# Altium PCB PCB_Step.PcbDoc
Units mil, origin at the board's own origin, x right, y up, seen from the top; angles counter-clockwise.
Board outline 6000 x 4000 mil, 2 copper layers (Top Layer, Bottom Layer); 41 components, 47 nets, 176 pads, 0 vias.
Unrouted connection lines stored in the file: 118.
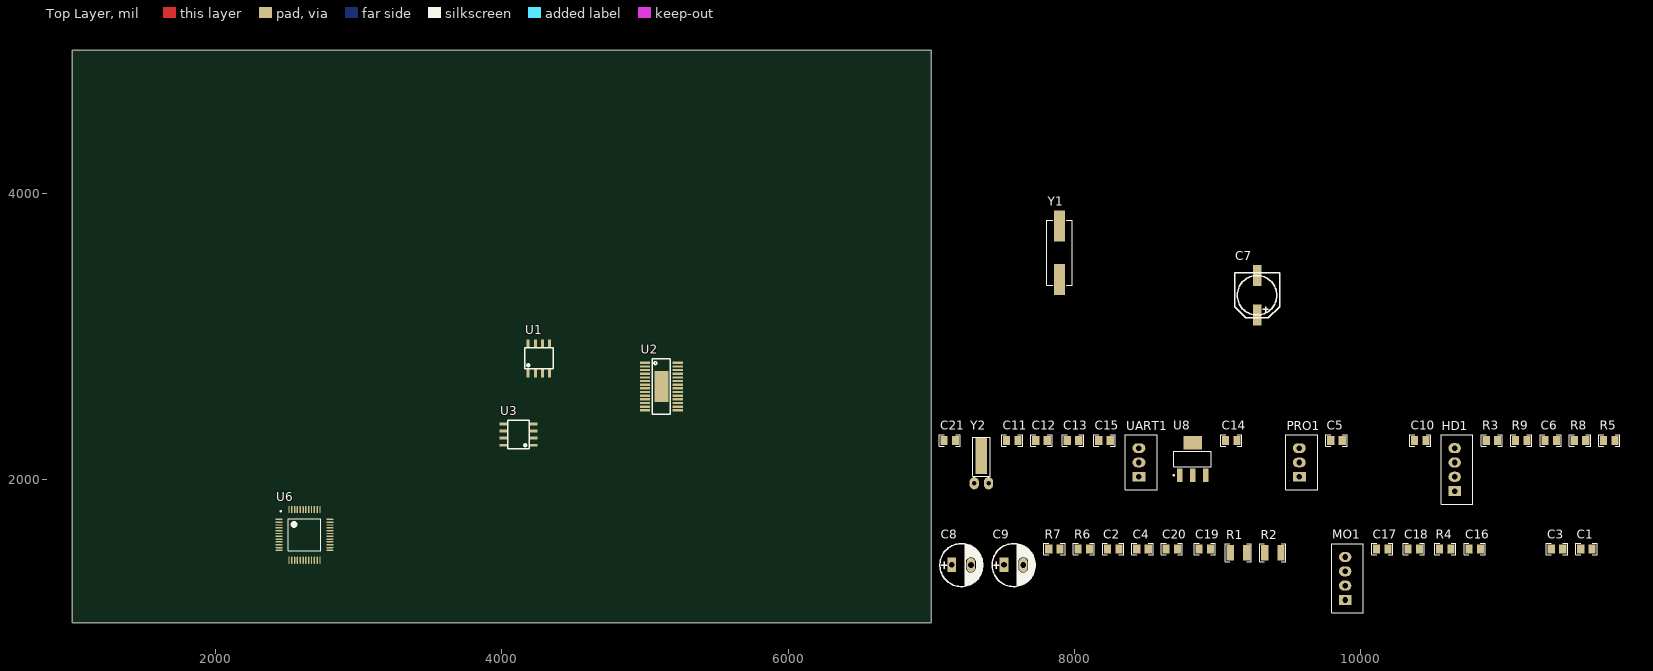
[diagram p0: Top Layer view]
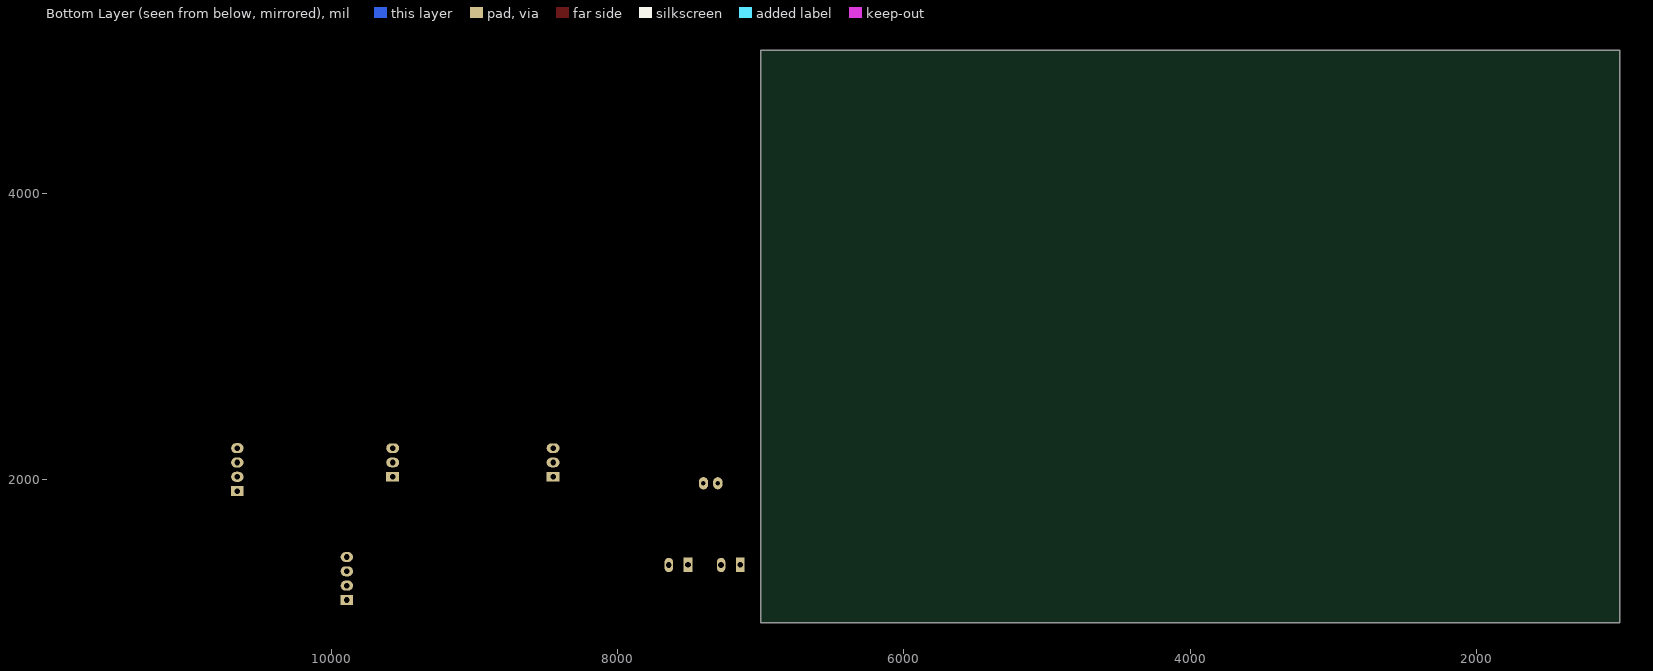
[diagram p1: Bottom Layer view, seen from below]

## Layer stack, top to bottom
Top Solder: solder mask 0.4, Solder Resist, Dk 3.5
Top Layer: signal copper 1.4
Dielectric 1: dielectric 12.6, FR-4, Dk 4.8
Bottom Layer: signal copper 1.4
Bottom Solder: solder mask 0.4, Solder Resist, Dk 3.5

## Board outline
1000,1000 7000,1000 7000,5000 1000,5000

## Design rules (kind name [scope] priority, off if disabled: settings)
Clearance [All] p1: gap=10 ignorepadtopadclearanceinfootprint=FALSE except(0: Arc-Hole Track-Hole SMDPad-Hole THPad-Hole Via-Hole Fill-Hole Poly-Hole Region-Hole Text-Hole)
PolygonConnect [All] p1: connectstyle=Relief reliefconductorwidth=10 reliefentries=4 polygonreliefangle="90 Angle" airgapwidth=10
RoutingVias [All] p1: holewidth=28 width=50 viastyle="Through Hole" minholewidth=28 minwidth=50 maxholewidth=28 maxwidth=50
SolderMaskExpansion [All] p1: expansion=4
Width [All] p1: maxlimit=10 minlimit=10 preferedwidth=10
30 further rules are at their usual default settings.

## Components (designator, comment, footprint, x,y, rotation, side; value= is the part's Value field where it differs from the comment)
C1 "104" 0805_HV 11575,1515 r0 top
C2 "104" 0805_HV 8270,1515 r0 top
C3 "104" 0805_HV 11370,1515 r0 top
C4 "104" 0805_HV 8475,1515 r0 top
C5 "22P" 0805_HV 9830,2275 r0 top value=103
C6 "104" 0805_HV 11325,2275 r0 top
C7 "330uF" TU_NHOM_220uF_25V_MH 9275,3287.8 r0 top value="47uF/16 - 50V"
C8 "390uF" CP1/3.0 7210,1405 r0 top
C9 "390uF" CP1/3.0 7575,1405 r0 top
C10 "104" 0805_HV 10415,2275 r0 top
C11 "105" 0805_HV 7565,2275 r0 top value=103
C12 "105" 0805_HV 7770,2275 r0 top value=103
C13 "105" 0805_HV 7990,2275 r0 top value=103
C14 "22P" 0805_HV 9095,2275 r0 top value=103
C15 "22P" 0805_HV 8210,2275 r0 top value=103
C16 "103" 0805_HV 10795,1515 r0 top
C17 "103" 0805_HV 10150,1515 r0 top
C18 "0.1uF" 0805_HV 10370,1515 r0 top
C19 "103" 0805_HV 8910,1515 r0 top
C20 "0.47uF" 0805_HV 8680,1515 r0 top
C21 "22P" 0805_HV 7130,2275 r0 top value=103
HD1 "Header 4 Cong_MH" "HEADER 4" 10655,2070 r90 top
MO1 "Header 4_MH" "HEADER 4" 9890,1310 r90 top
PRO1 "Header 3_MH" "HEADER 3" 9570,2120 r90 top
R1 "RT0603DRE07140KL" 1210 9145,1490 r0 top value=140k
R2 "RT0603DRE07140KL" 1210 9385,1490 r0 top value=140k
R3 "10K" 0805_HV 10915,2275 r0 top
R4 "1M" 0805_HV 10590,1515 r0 top
R5 "0R" 0805_HV 11735,2275 r0 top
R6 "50K" 0805_HV 8065,1515 r0 top
R7 "30K" 0805_HV 7860,1515 r0 top
R8 "100K" 0805_HV 11530,2275 r0 top
R9 "100K" 0805_HV 11120,2275 r0 top
U1 "ACS711" "SOP 8" 4260,2847.5 r0 top
U2 "DRV8841PWPR" TSSOP-28EP 5115,2650.5 r0 top
U3 "ACS711" "SOP 8" 4117.5,2315 r90 top
U6 "STM32F103C8T6 LQFP48 _MH" LQFP48 2623.9,1613.53 r0 top
U8 "AMS1117-3.3V SOT223 _MH" SOT223 8825,2145 r0 top
UART1 "Header 3_MH" "HEADER 3" 8450,2120 r90 top
Y1 "8MHZ" "XTAL 49S SMD" 7895,3585 r90 top
Y2 "32.768KHZ" XT32kn 7400,1975 r90 top

## Footprints (in the part's own frame and the unit in brackets; to place one, negate y for a bottom-side part, rotate by r counter-clockwise, add the part's x,y. Pads: shape width x height; smd on the part's side, far side on the other; paste and mask are expansions set on the pad)
0805_HV [mil] "0805 with 30mil clearance between pads"
  rect 50x63 smd: 1(-40,0) 2(40,0)
  silkscreen extent -74,-40 74,40, body extent -43,-29 43,29, height 57
1210 [mm] "1210 from SM-752 data"
  rect 1.3x2.7 smd: 1(1.45,0) 2(-1.45,0)
  silkscreen extent -2.32,-1.57 2.32,1.57, body extent -1.7,-1.35 1.7,1.35, height 1.35
CP1/3.0 [mil]
  rect 60x100 hole 40: 1(-67,0.5)
  oval 60x100 hole 40: 2(67,-0.5)
  silkscreen extent -150,-151 150,148, body extent -156,-161 159,154, height 453
"HEADER 3" [mm]
  rect 1.7x2.3 hole 1 paste+0: 1(-2.54,0)
  oval 1.7x2.3 hole 1 paste+0: 2(0,0) 3(2.54,0)
  silkscreen extent -4.83,-3.25 4.9,2.41
"HEADER 4" [mm]
  rect 1.8x2.2 hole 1: 1(-3.81,0)
  oval 1.8x2.2 hole 1: 2(-1.27,0) 3(1.27,0) 4(3.81,0)
  silkscreen extent -6.1,-3.25 6.17,2.41
LQFP48 [mm]
  rect 1.27x0.25 smd: 1(-4.524,2.775)
  oval 1.27x0.25 smd: 2(-4.524,2.275) 3(-4.524,1.775) 4(-4.524,1.275) 5(-4.524,0.775) 6(-4.524,0.275) 7(-4.524,-0.225) 8(-4.524,-0.725) 9(-4.524,-1.225) 10(-4.524,-1.725) 11(-4.524,-2.225) 12(-4.524,-2.725) 25(4.473,-2.725) 26(4.473,-2.225) 27(4.473,-1.725) 28(4.473,-1.225) 29(4.473,-0.725) 30(4.473,-0.225) 31(4.473,0.275) 32(4.473,0.775) 33(4.473,1.275) 34(4.473,1.775) 35(4.473,2.275) 36(4.473,2.775)
  oval 0.25x1.27 smd: 13(-2.775,-4.473) 14(-2.275,-4.473) 15(-1.775,-4.473) 16(-1.275,-4.473) 17(-0.775,-4.473) 18(-0.275,-4.473) 19(0.225,-4.473) 20(0.725,-4.473) 21(1.225,-4.473) 22(1.725,-4.473) 23(2.225,-4.473) 24(2.725,-4.473) 37(2.725,4.524) 38(2.225,4.524) 39(1.725,4.524) 40(1.225,4.524) 41(0.725,4.524) 42(0.225,4.524) 43(-0.275,4.524) 44(-0.775,4.524) 45(-1.275,4.524) 46(-1.775,4.524) 47(-2.275,4.524) 48(-2.775,4.524)
  silkscreen extent -4.35,-2.82 2.82,4.35, body extent -4.53,-4.47 4.47,4.53, height 1.5
"SOP 8" [mil] "LQFP64"
  rect 20x60 smd: 1(-75,-102.5) 2(-25,-102.5) 3(25,-102.5) 4(75,-102.5) 5(75,102.5) 6(25,102.5) 7(-25,102.5) 8(-75,102.5)
  silkscreen extent -100,-74 100,74, body extent -98,-120 100,117, height 63
SOT223 [mm]
  rect 1x2.4 smd: 1(-2.3,-2.9) 2(0,-2.9) 3(2.3,-2.9)
  rect 3.3x2.4 smd: 4(0,2.9)
  silkscreen extent -3.47,-3.02 3.35,1.4, body extent -3.25,-3.56 3.25,3.4, height 1.68
TSSOP-28EP [mil]
  rect 71x16 smd: 1(-114,166.5) 2(-114,140.5) 3(-114,115.5) 4(-114,89.5) 5(-114,63.5) 6(-114,38.5) 7(-114,12.5) 8(-114,-12.5) 9(-114,-38.5) 10(-114,-64.5) 11(-114,-89.5) 12(-114,-115.5) 13(-114,-140.5) 14(-114,-166.5) 15(114,-166.5) 16(114,-140.5) 17(114,-115.5) 18(114,-89.5) 19(114,-64.5) 20(114,-38.5) 21(114,-12.5) 22(114,12.5) 23(114,38.5) 24(114,63.5) 25(114,89.5) 26(114,115.5) 27(114,140.5) 28(114,166.5)
  rect 98x217 smd: 29(0,-0.5)
  silkscreen extent -63,-193 63,194, body extent -126,-191 126,191, height 46
TU_NHOM_220uF_25V_MH [mm]
  rect 1.5x3.75 smd: 1(0,-3.5) 2(0,3.5)
  silkscreen extent -4,-4 4,4, body extent -4.15,-5 4.15,4, height 11.23
XT32kn [mil] "Crystal for 32,768kHz, 2pin"
  oval 85x65 hole 31: 1(0,0) 2(0,100)
  rect 250x80 smd: 3(190,52)
  silkscreen extent 34,-12 320,109, body extent -7,-5 343,107, height 79
"XTAL 49S SMD" [mm]
  rect 5.5x2 smd: 1(-4.75,0) 2(4.75,0)
  silkscreen extent -5.75,-2.25 5.75,2.25, body extent -6.15,-2.35 6.15,2.35, height 4.31

## Part data
C1 C2 C3 C4 C6 C10 C16 C17 C18 C19 C20: library part "Capacitor 0805", "Ceramic Chip Capacitor - Standard", PackageDocument=Mar-2001, Code_IPC=2012[0805], Code_JEITA=0805, ComponentLink1Description="Manufacturer Link", ComponentLink1URL=http://www.kemet.com/, ComponentLink2Description=Datasheet, ComponentLink2URL=http://www.kemet.com/kemet/web/homepage/kechome.nsf/vapubfilesname/F3102TA.pdf/$file/F3102TA.pdf, DatasheetDocument=Mar-2001, LatestRevisionDate=19-Mar-2004, LatestRevisionNote="Silkscreen size reduced.", Note="Footprint corresponds to dimensions for bulk cassette packaging. This case size has tightened tolerances.", PackageReference=0805, Published=17-Jul-2002, Publisher="Altium Limited"
C5 C11 C12 C13 C14 C15 C21: library part CM, "Cap SMD"
C7: library part TU_NHOM_330uF_16V_MH, "TU_NHOM_330uF_16V_MH", Description 1="470uF/6,3V - 330uF/10V - 220uF/16V", Description 2="100uF/25V - 35V - 47uF/50V - 22uF/100V", Description 3="33uF => 47uF/63V - 1uF => 4,7uF/160V", Description 4="1uF => 2,2uF/250V - 1uF/350V"
C8 C9: library part "Capacitor TuHoa", Cap_Case=10x22, Manufacturer=Nichicon, PartNumber=UHW1H391MPD6, Supplier Part Number 1=493-6885-ND, Tolerance_%=20, Value1=Unknown, Value2=50V, AEC Category=Q200, AEC Grade=N/A, AEC Qualified=N, Cap_F=0.000390, ComponentLink1Description="Datasheet link", ComponentLink1URL=http://nichicon-us.com/english/products/pdfs/e-uhw.pdf, CompType=Capacitor, LatestRevisionDate=2015-12-17, MountType=TH, PackageReference=10x22, Polarized=Y, Publisher="Texas Instruments", RoHS=Y, Series=ZL, Supplier 1=Digi-Key, SymbolVersion=2008-07-09, TaMax_C=105, TaMin_C=-40, Technology=AL, U/M=EA, ValueDisplayed=390uF, VDC_V=50
HD1: "Header 4P XH2.54 cong"
MO1: "Header 4P XH2.54 th?ng"
PRO1 UART1: "Header 3P XH2.54 th?ng"
R1 R2: "RES, 140 k, 0.5%, 0.1 W, 0603", Manufacturer="Yageo America", Power_W=0.1, TempCo="50 ppm/C", Tolerance_%=0.5, Value1=0.5%, Value2=0.1W, Value_Code=140k, ValueDisplayed=200mR, ComponentLink1Description="Datasheet link", ComponentLink1URL=http://www.yageo.com/pdf/PYu-RT_1-to-0.05_RoHS_L_3.pdf, CompType=Resistor, EIA_Code=E192, LatestRevisionDate=2014-09-19, MountType=SMT, PackageReference=0603, PartNumber=RT0603DRE07140KL, Published=2008-06-26, Publisher="Texas Instruments", Res_ohm=140000, RoHS=Y, SymbolVersion=2009-05-29, Technology="Thin Film", U/M=EA, VDC_V=75
R3 R4 R5 R6 R7 R8 R9: library part "R nho", "RES, 100, 1%, 0.1 W, 0402", Manufacturer=Panasonic, PartNumber=ERJ-2RKF1000X, Power_W=0.1, Supplier Part Number 1=P100LCT-ND, TempCo="100 ppm/C", Tolerance_%=1, Value1=1%, Value2=0.1W, Value_Code=100R, AEC Category=Q200, AEC Qualified=?, ComponentLink1Description="Datasheet link", ComponentLink1URL=http://industrial.panasonic.com/www-data/pdf/AOA0000/AOA0000CE2.pdf, CompType=Resistor, EIA_Code=E96, LatestRevisionDate=2016-01-08, MountType=SMT, PackageReference=0402, Published=2008-06-26, Publisher="Texas Instruments", Res_ohm=100, RoHS=Y, Supplier 1=Digi-Key, Supplier 2=Mouser, Supplier 3=Farnell, Supplier Part Number 2=667-ERJ-2RKF1000X, Supplier Part Number 3=2304034, SymbolVersion=2009-05-29, Technology="Thick Film", U/M=EA, VDC_V=50
U1 U3: library part ACS712
U2: BOM_LCSC Assembly=Yes, BOM_Manufacturer=TI, BOM_Manufacturer Part=DRV8841PWPR, BOM_Supplier=LCSC, BOM_Supplier Part=C36542, image=//image.lceda.cn/szlcsc/C36542.jpg, SMT Type=Extend, spicePre=U
Y1 Y2: library part "CRYSTAL_49S DIP_MH", "Crystal Oscillator", LatestRevisionDate=17-Jul-2002, LatestRevisionNote="Re-released for DXP Platform.", PackageReference=R38, Published=8-Jun-2000, Publisher="Altium Limited"

## Nets (pads, with @x,y where several pads share a name; then routed paths per layer and width w, separated by ;. In a path a pad name is that pad's centre, name@x,y a point inside that pad or via, vN(x,y) a via of type N, cw(c..) or ccw(c..) an arc to the next point about the centre after c; other vN are vias at no path point)
3.3V: C1.2 C2.2 C6.2 C12.2 C13.2 R3.2 R5.2 U1.8 U3.8 U6.9 U6.24 U6.36 U6.48 U8.2 U8.4
5V: C7.1 C11.2 HD1.4 U8.3
AI0: U2.24 U6.41
AI1: U2.25 U6.40
BI1: U2.26 U6.39
BI2: U2.27 U6.38
BOOT0: R8.2 U6.44
BOOT1: R9.1 U6.20
CLK: U6.15
CSN: U6.14
DECAY: U2.19 U6.28
GND: C1.1 C2.1 C3.1 C4.1 C5.1 C6.1 C7.2 C8.2 C9.2 C10.1 C11.1 C12.1 C13.1 C14.1 C15.1 C16.1 C19.1 C20.1 C21.1 HD1.2 HD1.3 PRO1.3 R1.1 R2.1 R7.1 R8.1 R9.2 U1.5 U1.6 U2.14 U2.28 U2.29 U3.5 U3.6 U6.8 U6.23 U6.35 U6.47 U8.1 UART1.1
IA: C3.2 U1.7 U6.10
IB: C4.2 U3.7 U6.11
MA+: MO1.1 U1.3 U1.4
MA-: MO1.2 U2.7
MB+: MO1.3 U3.3 U3.4
MB-: MO1.4 U2.8
MISO: U6.16
MOSI: U6.17
MOTOR_EN: U2.17 U6.26
MOTOR_RST: U2.16 U6.25
NetC17_1: C17.1 U2.2
NetC17_2: C17.2 U2.1
NetC18_1: C18.1 R4.1 U2.3
NetR1_2: R1.2 U2.6
NetR2_2: R2.2 U2.9
NetR6_1: R6.1 R7.2 U2.12 U2.13
NetU1_1: U1.1 U1.2 U2.5
NetU2_10: U2.10 U3.1 U3.2
nFAULT: U2.18 U6.27
OSCIN: C14.2 U6.5 Y1.2
OSCIN2: C21.2 U6.3 Y2.2
OSCOUT: C5.2 U6.6 Y1.1
OSCOUT2: C15.2 U6.4 Y2.1
PWM_CH1: U2.20 U6.29
PWM_CH2: U2.21 U6.30
PWM_CH3: U2.22 U6.31
PWM_CH4: U2.23 U6.32
RST: C10.2 R3.1 U6.7
RX: U6.43 UART1.3
SWCLK: PRO1.2 U6.37
SWDIO: PRO1.1 U6.34
TX: U6.42 UART1.2
V3P3OUT: C20.2 R6.2 U2.15
Vbat: R5.1 U6.1
VCC_MO: C8.1 C9.1 C16.2 C18.2 C19.2 HD1.1 R4.2 U2.4 U2.11
pads on no net: U6.2 U6.12 U6.13 U6.18 U6.19 U6.21 U6.22 U6.33 U6.45 U6.46 Y2.3